# EAGLE board TriGUIDE_v3_opt (EAGLE 5.05)
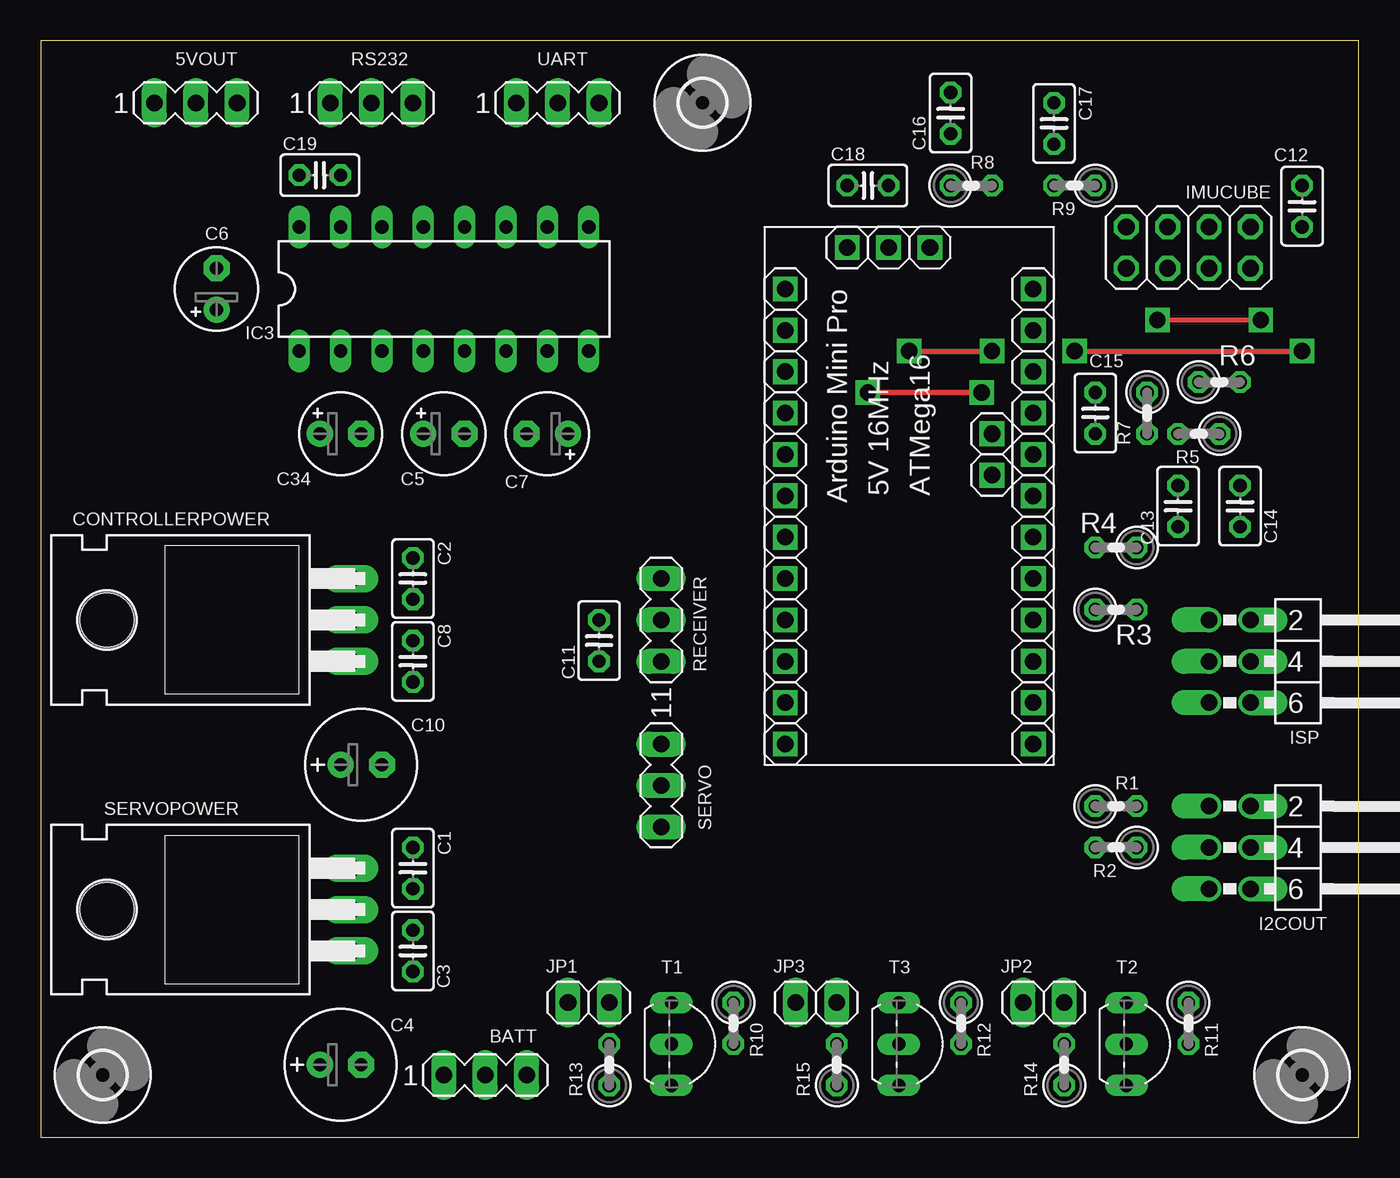
[diagram p0: board, top side]
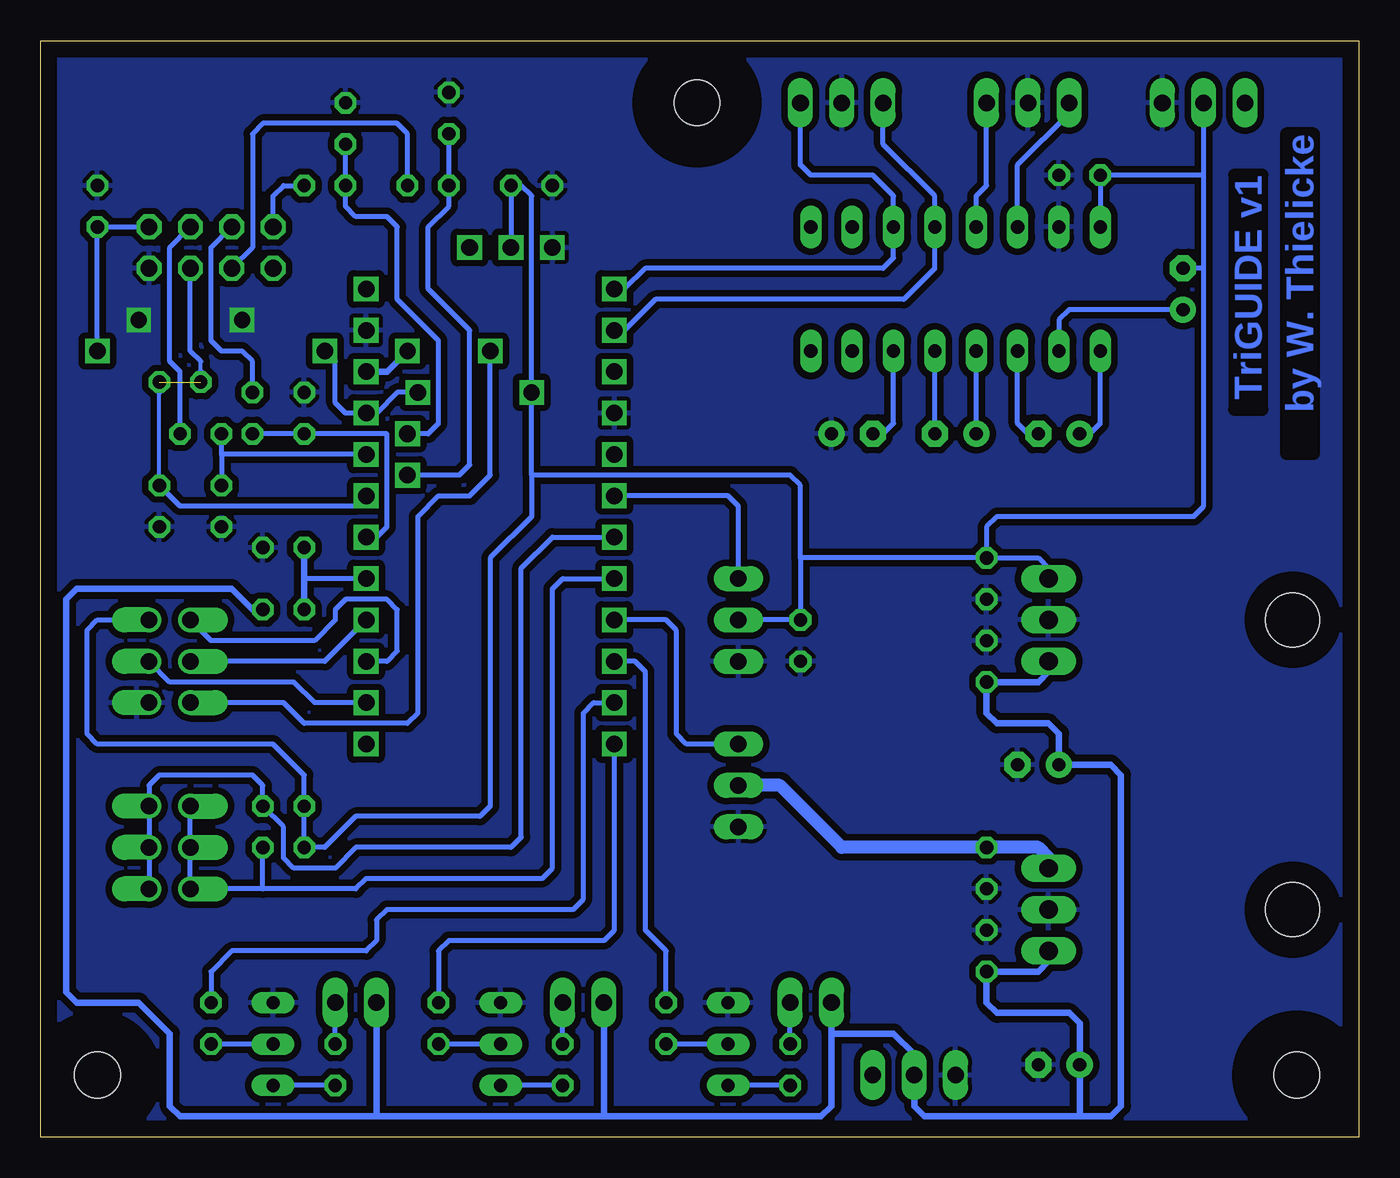
[diagram p1: board, bottom side, seen from below]

Size 80.95 x 67.31 mm. Coordinates in mm from the lower left corner, seen from the top.
Outline: 0,0 80.95,0 80.95,67.31 0,67.31 0,0
Copper layers (1*16): Top 0.035mm / dielectric 1.5mm / Bottom 0.035mm
Design rules "default *": minimum track width 10mil, minimum drill 24mil, track to track 12mil, track to pad 12mil, pad to pad 12mil, via to via 12mil, smd to smd 8mil, copper to edge 40mil, drill to drill 8mil, minimum pad ring 10mil, minimum via ring 8mil, stop-mask expansion 4mil, vias tented up to drill 0mil, thermal gap 10mil

## Footprints (pad centres in the part's own frame; a part is rotated, then mirrored left to right if it is on the bottom)
MA03-1 = drill 1.016 long: 1 -2.54,0; 2 0,0; 3 2.54,0
C025-025X050 = drill 0.813 octagon: 1 -1.27,0; 2 1.27,0
E2,5-7 = drill 0.813 pad 1.6 round: + -1.27,0 | drill 0.813 pad 1.6 octagon: - 1.27,0
E2,5-5 = drill 0.813 pad 1.6 round: + -1.27,0 | drill 0.813 pad 1.6 octagon: - 1.27,0
TO220H = drill 1.118 long: 1 -2.54,-10.16; 2 0,-10.16; 3 2.54,-10.16 | hole 3.302: 0,4.826
2,8 = hole 2.8: 0,0
MA07-2W = drill 1.016 offset: 1 -2.54,-2.54; 2 -2.54,0; 3 0,-2.54; 4 0,0; 5 2.54,-2.54; 6 2.54,0
DIL16 = drill 0.813 long: 1 -8.89,-3.81; 2 -6.35,-3.81; 3 -3.81,-3.81; 4 -1.27,-3.81; 5 1.27,-3.81; 6 3.81,-3.81; 7 6.35,-3.81; 8 8.89,-3.81; 9 8.89,3.81; 10 6.35,3.81; 11 3.81,3.81; 12 1.27,3.81; 13 -1.27,3.81; 14 -3.81,3.81; 15 -6.35,3.81; 16 -8.89,3.81
2X04 = drill 1.016 octagon: 1 -3.81,-1.27; 2 -3.81,1.27; 3 -1.27,-1.27; 4 -1.27,1.27; 5 1.27,-1.27; 6 1.27,1.27; 7 3.81,-1.27; 8 3.81,1.27
1X02 = drill 1.016 long: 1 -1.27,0; 2 1.27,0
0207/2V = drill 0.813 octagon: 1 -1.27,0; 2 1.27,0
TO92-EBC = drill 0.813 long: B 0,-1.27; C 2.54,-1.27; E -2.54,-1.27
1X12 = drill 1.016 square: 2 0,17.78; 3 0,15.24; 4 0,12.7; 5 0,10.16; 6 0,7.62; 7 0,5.08; 8 0,2.54; 9 0,0; 10 15.24,0; 11 15.24,2.54; 12 15.24,5.08; 13 15.24,7.62; A0 15.24,10.16; A1 15.24,12.7; A2 15.24,15.24; A3 15.24,17.78; A4 12.7,16.51; A5 12.7,19.05; GND 15.24,25.4; GND2 3.81,30.48; GND3 0,20.32; RAW 15.24,27.94; RST 15.24,22.86; RST2 0,22.86; RXI2 0,25.4; RXI3 8.89,30.48; TXO2 0,27.94; VCC 15.24,20.32; VCC2 6.35,30.48

## Placement (x,y rotation side)
5VOUT  MA03-2W  [MA03-1]  9.53,63.5 0 top
BATT  lipo 12.6V  [MA03-1]  27.3,3.81 0 top
C1  100nF  [C025-025X050]  22.86,16.51 270 top
C2  100nF  [C025-025X050]  22.86,34.29 270 top
C3  100nF  [C025-025X050]  22.86,11.43 90 top
C4  100µF  [E2,5-7]  18.41,4.45 0 top
C5  1µF  [E2,5-5]  24.77,43.18 0 top
C6  1µF  [E2,5-5]  10.79,52.07 90 top
C7  1µF  [E2,5-5]  31.11,43.18 180 top
C8  100nF  [C025-025X050]  22.86,29.21 270 top
C10  100µF  [E2,5-7]  19.68,22.86 0 top
C11  100nF  [C025-025X050]  34.29,30.48 270 top
C12  100nF  [C025-025X050]  77.47,57.15 90 top
C13  100nF  [C025-025X050]  69.85,38.73 270 top
C14  100nF  [C025-025X050]  73.66,38.73 90 top
C15  100nF  [C025-025X050]  64.77,44.45 270 top
C16  1µF  [C025-025X050]  55.88,62.87 90 top
C17  1µF  [C025-025X050]  62.23,62.23 270 top
C18  100nF  [C025-025X050]  50.8,58.42 0 top
C19  100nF  [C025-025X050]  17.14,59.05 0 top
C34  1µF  [E2,5-5]  18.41,43.18 0 top
CONTROLLERPOWER  7805T  [TO220H]  8.89,31.75 90 top
H1  MOUNT-HOLE2.8  [2,8]  77.47,3.81 0 top
H2  MOUNT-HOLE2.8  [2,8]  40.64,63.5 0 top
H3  MOUNT-HOLE2.8  [2,8]  3.81,3.81 0 top
I2COUT  [MA07-2W]  74.3,17.78 270 top
IC3  MAX232  [DIL16]  24.77,52.07 0 top
IMUCUBE  [2X04]  70.48,54.61 180 top
ISP  [MA07-2W]  74.3,29.21 270 top
JP1  LED1  [1X02]  33.66,8.26 0 top
JP2  LED2  [1X02]  61.6,8.26 0 top
JP3  LED3  [1X02]  47.62,8.26 0 top
R1  5k  [0207/2V]  66.04,20.32 0 top
R2  5k  [0207/2V]  66.04,17.78 180 top
R3  51k  [0207/2V]  66.04,32.38 0 top
R4  33k  [0207/2V]  66.04,36.2 180 top
R5  36k  [0207/2V]  71.12,43.18 180 top
R6  36k  [0207/2V]  72.39,46.35 0 top
R7  36k  [0207/2V]  67.94,44.45 270 top
R8  10k  [0207/2V]  57.15,58.42 0 top
R9  10k  [0207/2V]  63.5,58.42 180 top
R10  5k  [0207/2V]  42.55,6.99 270 top
R11  5k  [0207/2V]  70.48,6.99 270 top
R12  5k  [0207/2V]  56.52,6.99 270 top
R13  390  [0207/2V]  34.93,4.45 90 top
R14  390  [0207/2V]  62.87,4.45 90 top
R15  390  [0207/2V]  48.9,4.45 90 top
RECEIVER  MA03-2W  [MA03-1]  38.1,31.75 90 top
RS232  MA03-2W  [MA03-1]  20.32,63.5 0 top
SERVO  MA03-2W  [MA03-1]  38.1,21.59 270 top
SERVOPOWER  7805T  [TO220H]  8.89,13.97 90 top
T1  BC548B  [TO92-EBC]  40.01,5.71 270 top
T2  BC548B  [TO92-EBC]  67.94,5.71 270 top
T3  BC548B  [TO92-EBC]  53.98,5.71 270 top
U$1  ARDUINOMINIPRO  [1X12]  45.72,24.13 0 top
UART  MA03-2W  [MA03-1]  31.75,63.5 0 top

## Library data of the parts
5VOUT BATT RECEIVER RS232 SERVO UART = con-lstb
C1-C8 C10-C19 C34 R10-R15 = rcl
CONTROLLERPOWER SERVOPOWER = linear
H1-H3 = holes
I2COUT ISP U$1 = TricopterSpecial
IC3 = maxim
IMUCUBE JP1-JP3 = pinhead
R1-R9 = resistor
T1-T3 = transistor

## Nets
+12V: BATT.2 C3.1 C4.+ C8.2 C10.+ CONTROLLERPOWER.1 JP1.1 JP2.1 JP3.1 R3.2 SERVOPOWER.1
ACCX: C16.1 R8.1 U$1.A4
ACCY: C17.2 R9.2 U$1.A5
GND: 5VOUT.3 BATT.1 C1.2 C2.2 C3.2 C4.- C7.+ C8.1 C10.- C11.2 C12.2 C13.2 C14.1 C15.1 C16.2 C17.1 C18.1 C19.2 CONTROLLERPOWER.2 IC3.15 IMUCUBE.2 ISP.6 R4.1 RECEIVER.1 RS232.2 SERVO.3 SERVOPOWER.2 T1.E T2.E T3.E U$1.GND U$1.GND2 U$1.GND3 UART.2
GYRONICK: C14.2 IMUCUBE.4 R6.1 R6.2 U$1.A2
GYROROLL: C13.1 R5.2 U$1.A3
GYROYAW: C15.2 R7.2 U$1.A1
LED1: R10.1 U$1.7
LED2: R11.1 U$1.8
LED3: R12.1 U$1.9
N$1: C34.+ IC3.1
N$2: C34.- IC3.3
N$3: C5.- IC3.5
N$4: C5.+ IC3.4
N$5: IMUCUBE.3 R5.1
N$6: C1.1 SERVO.2 SERVOPOWER.3
N$7: C6.+ IC3.2
N$8: C7.- IC3.6
N$9: ISP.1 U$1.12
N$10: U$1.A0
N$11: ISP.4 U$1.11
N$12: ISP.5 U$1.RST
N$13: ISP.3 U$1.13
N$14: IC3.14 RS232.1
N$15: IC3.13 RS232.3
N$16: R3.1 R4.2
N$18: IMUCUBE.5 R7.1
N$19: IMUCUBE.6 R8.2
N$20: IMUCUBE.7 R9.1
N$21: JP1.2 R13.2
N$22: JP2.2 R14.2
N$23: R10.2 T1.B
N$24: R11.2 T2.B
N$25: R12.2 T3.B
N$26: R13.1 T1.C
N$27: R14.1 T2.C
N$28: R15.1 T3.C
N$29: JP3.2 R15.2
REC: RECEIVER.3 U$1.3
RXD: IC3.12 U$1.RXI2 UART.1
SCL: I2COUT.1 I2COUT.3 I2COUT.5 R2.1 U$1.5
SDA: I2COUT.2 I2COUT.4 I2COUT.6 R1.2 U$1.4
SERVO: SERVO.1 U$1.6
TXD: IC3.11 U$1.TXO2 UART.3
VCC: 5VOUT.2 C2.1 C6.- C11.1 C12.1 C18.2 C19.1 CONTROLLERPOWER.3 IC3.16 IMUCUBE.1 ISP.2 R1.1 R2.2 RECEIVER.2 U$1.VCC U$1.VCC2

## Tracks (layer width: path | path; a pad name or v marks a point on that pad's centre or on a via)
+12V
  Bottom 0.406: 32.38,6.35 28.57,6.35 27.3,5.08 BATT.2 27.3,1.91 26.67,1.27 17.14,1.27 | 32.38,6.35 JP1.1 | 46.36,1.27 JP3.1 | 46.36,1.27 33.02,1.27 32.38,1.91 32.38,6.35 | 60.33,1.27 JP2.1 | 46.36,1.27 60.33,1.27 | SERVOPOWER.1 19.05,10.79 19.68,10.16 C3.1 22.86,8.26 22.22,7.62 17.78,7.62 17.14,6.99 C4.+ 17.14,1.27 | 17.14,1.27 15.24,1.27 14.61,1.91 14.61,22.23 15.24,22.86 C10.+ 18.41,24.77 19.05,25.4 22.22,25.4 22.86,26.04 C8.2 19.68,27.94 19.05,28.57 CONTROLLERPOWER.1 | 60.33,1.27 72.39,1.27 73.02,1.91 73.02,6.35 74.93,8.26 78.74,8.26 79.38,8.89 79.38,33.02 78.74,33.66 69.21,33.66 67.94,32.38 R3.2
ACCX
  Bottom 0.305: U$1.A4 55.25,40.64 54.61,41.27 54.61,49.53 57.15,52.07 57.15,55.88 55.88,57.15 R8.1 C16.1
ACCY
  Bottom 0.305: U$1.A5 57.15,43.18 56.52,43.81 56.52,48.9 59.05,51.44 59.05,55.88 59.69,56.52 61.6,56.52 62.23,57.15 R9.2 C17.2
GND  (via drill 1)
  Top 0.305: v68.58,50.16 v74.93,50.16
  pour Bottom (isolate 0.406): 0,67.31 81.28,67.31 81.28,0 0,0
GYRONICK  (1 unrouted)
  Bottom 0.254: C14.2 73.66,45.72 | 71.12,46.99 71.12,47.62
  Bottom 0.305: U$1.A2 61.6,38.73 72.39,38.73 C14.2 | 71.12,47.62 71.75,48.26 IMUCUBE.4
  Bottom 0.406: R6.1 71.12,46.99 | 73.66,45.72 R6.2
GYROROLL
  Bottom 0.305: U$1.A3 69.85,41.91 | 69.85,41.91 R5.2 | 69.85,41.91 C13.1
GYROYAW
  Bottom 0.305: U$1.A1 60.33,36.83 59.69,37.47 59.69,43.18 C15.2 R7.2
LED1
  Bottom 0.305: R10.1 42.55,11.43 43.82,12.7 43.82,28.57 44.45,29.21 U$1.7
LED2
  Bottom 0.305: U$1.8 46.99,26.67 47.62,26.04 47.62,14.61 48.26,13.97 59.69,13.97 60.33,13.34 60.33,12.06 60.96,11.43 69.21,11.43 70.48,10.16 R11.1
LED3
  Bottom 0.305: R12.1 56.52,11.43 55.88,12.06 46.36,12.06 45.72,12.7 U$1.9
N$1
  Bottom 0.305: C34.+ 16.51,43.18 15.88,43.81 IC3.1
N$2
  Bottom 0.305: C34.- 20.32,43.18 20.95,43.81 IC3.3
N$3
  Bottom 0.305: C5.- IC3.5
N$4
  Bottom 0.305: C5.+ IC3.4
N$5
  Bottom 0.305: R5.1 72.39,46.99 73.02,47.62 73.02,54.61 IMUCUBE.3
N$6
  Bottom 0.813: SERVOPOWER.3 19.05,17.14 19.68,17.78 C1.1 31.75,17.78 35.56,21.59 SERVO.2
N$7
  Bottom 0.305: C6.+ 17.78,50.8 18.41,50.16 IC3.2
N$8
  Bottom 0.305: C7.- 29.21,43.18 28.57,43.81 IC3.6
N$9
  Bottom 0.305: U$1.12 59.69,29.21 59.05,29.84 59.05,32.38 59.69,33.02 62.23,33.02 62.87,32.38 62.87,31.75 64.14,30.48 70.48,30.48 ISP.1
N$10
  Bottom 0.305: U$1.A0 64.77,34.29
N$11
  Bottom 0.305: U$1.11 64.14,26.67 65.41,27.94 73.02,27.94 ISP.4
N$12  (via drill 1)
  Top 0.305: v53.34,48.26 v58.42,48.26
  Bottom 0.305: ISP.5 66.04,26.67 64.77,25.4 58.42,25.4 57.79,26.04 57.79,38.1 56.52,39.37 54.61,39.37 53.34,40.64 v53.34,48.26
  Bottom 0.406: U$1.RST 59.69,46.99 v58.42,48.26
N$13
  Bottom 0.305: U$1.13 63.5,29.21 ISP.3
N$14
  Bottom 0.305: IC3.14 20.95,59.69 17.78,62.87 RS232.1
N$15
  Bottom 0.305: IC3.13 23.5,57.78 22.86,58.42 RS232.3
N$16
  Bottom 0.406: R3.1 R4.2
N$18
  Bottom 0.305: R7.1 67.94,47.62 68.58,48.26 69.85,48.26 70.48,48.9 70.48,54.61 IMUCUBE.5
N$19
  Bottom 0.305: R8.2 58.42,61.59 59.05,62.23 67.31,62.23 67.94,61.59 67.94,54.61 IMUCUBE.6
N$20
  Bottom 0.305: R9.1 66.04,58.42 66.67,57.78 IMUCUBE.7
N$21
  Bottom 0.305: R13.2 JP1.2
N$22
  Bottom 0.305: R14.2 JP2.2
N$23
  Bottom 0.305: T1.B R10.2
N$24
  Bottom 0.305: T2.B R11.2
N$25
  Bottom 0.305: T3.B R12.2
N$26
  Bottom 0.305: R13.1 T1.C
N$27
  Bottom 0.305: R14.1 T2.C
N$28
  Bottom 0.305: R15.1 T3.C
N$29
  Bottom 0.305: R15.2 JP3.2
REC
  Bottom 0.305: RECEIVER.3 38.1,38.73 38.74,39.37 U$1.3
RXD
  Bottom 0.305: UART.1 29.21,60.96 26.04,57.78 IC3.12 26.04,53.34 27.94,51.44 43.18,51.44 45.09,49.53 U$1.RXI2
SCL
  Bottom 0.305: I2COUT.1 I2COUT.3 I2COUT.5 67.31,15.24 | 67.31,15.24 R2.1 | U$1.5 48.9,34.29 49.53,33.66 49.53,16.51 50.17,15.88 60.96,15.88 61.6,15.24 67.31,15.24
SDA
  Bottom 0.305: I2COUT.6 I2COUT.4 I2COUT.2 74.3,21.59 73.66,22.23 67.94,22.23 67.31,21.59 R1.2 66.04,19.05 66.04,17.14 65.41,16.51 62.87,16.51 61.6,17.78 52.07,17.78 51.44,18.41 51.44,34.92 49.53,36.83 U$1.4
SERVO
  Bottom 0.305: SERVO.1 41.28,24.13 41.91,24.77 41.91,31.11 42.55,31.75 U$1.6
TXD
  Bottom 0.305: UART.3 34.29,59.69 33.66,59.05 29.84,59.05 28.57,57.78 IC3.11 28.57,53.98 29.21,53.34 43.82,53.34 45.09,52.07 U$1.TXO2
VCC  (via drill 1)
  Top 0.305: v50.8,45.72 v57.79,45.72 | v63.5,48.26 v77.47,48.26
  Bottom 0.305: CONTROLLERPOWER.3 19.05,34.92 19.68,35.56 C2.1 | IC3.16 C19.1 9.53,59.05 | 9.53,53.34 C6.- | 9.53,53.34 9.53,38.73 10.16,38.1 22.22,38.1 22.86,37.47 C2.1 | 9.53,53.34 9.53,59.05 | U$1.VCC2 C18.2 51.44,58.42 50.8,57.78 v50.8,45.72 50.8,40.64 | 34.29,35.56 C11.1 RECEIVER.2 | IMUCUBE.1 C12.1 v77.47,48.26 | 50.8,40.64 34.93,40.64 34.29,40.01 34.29,35.56 | v57.79,45.72 59.05,45.72 60.33,44.45 U$1.VCC 62.23,44.45 62.87,45.09 62.87,47.62 v63.5,48.26 | 50.8,40.64 50.8,38.1 53.34,35.56 53.34,20.32 53.98,19.68 61.6,19.68 63.5,17.78 R2.2 R1.1 64.77,22.23 66.67,24.13 77.47,24.13 78.1,24.77 78.1,31.11 77.47,31.75 ISP.2 | C2.1 34.29,35.56 | 9.53,59.05 5VOUT.2

## Text on the board
Bottom: by W. Thielicke | TriGUIDE v1